# EAGLE board power (EAGLE 8.3.1)
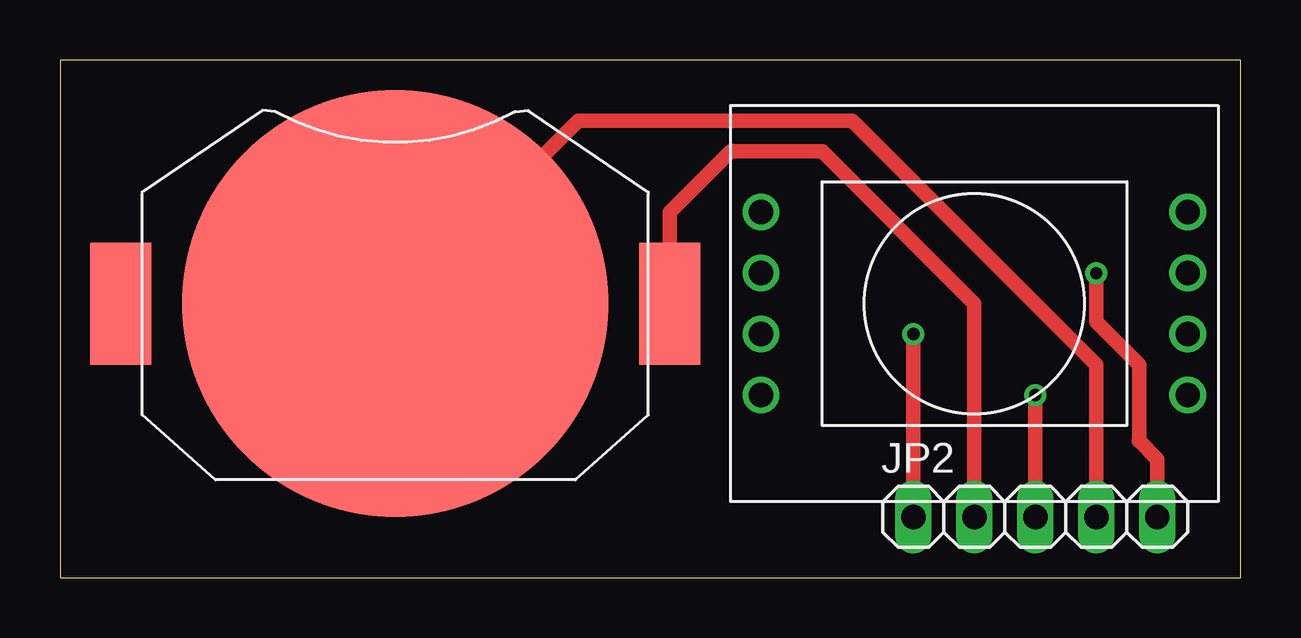
[diagram p0: board, top side]
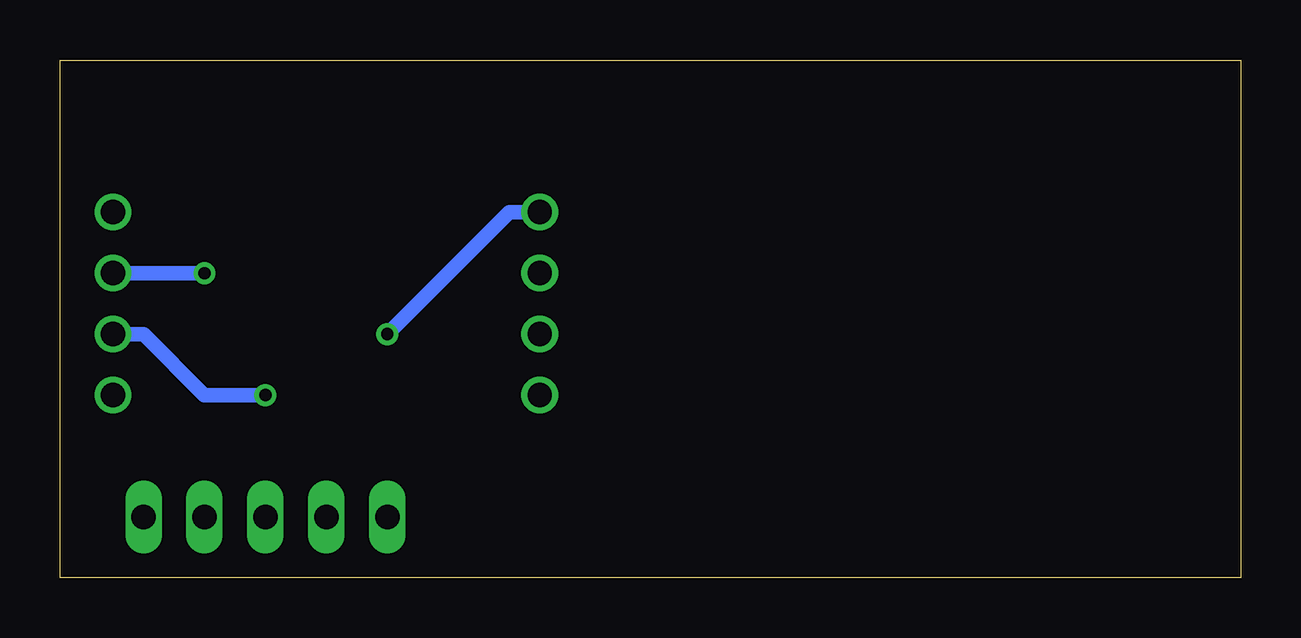
[diagram p1: board, bottom side, seen from below]

Size 49.2 x 21.58 mm. Coordinates in mm from the lower left corner, seen from the top.
Outline: 0,0 49.2,0 49.2,21.58 0,21.58 0,0
Copper layers (1*16): Top 0.035mm / dielectric 1.5mm / Bottom 0.035mm
Design rules "DRC Electronics Lab": minimum track width 16mil, minimum drill 19mil, track to track 16mil, track to pad 12mil, pad to pad 16mil, via to via 16mil, smd to smd 10mil, copper to edge 40mil, drill to drill 10mil, minimum pad ring 10mil, minimum via ring 8mil, stop-mask expansion 4mil, vias tented up to drill 0mil, thermal gap 10mil

## Footprints (pad centres in the part's own frame; a part is rotated, then mirrored left to right if it is on the bottom)
1X05 = drill 1.016 long: 1 -5.08,0; 2 -2.54,0; 3 0,0; 4 2.54,0; 5 5.08,0
MOMENTARY_POWER_BUTTON = drill 1.016: GND@0 -8.89,2.54; GND@1 8.89,2.54; IN@0 -8.89,7.62; IN@1 8.89,7.62; OFF@0 -8.89,0; OFF@1 8.89,0; OUT@0 -8.89,5.08; OUT@1 8.89,5.08
CR2032-20MM-CONN = smd 17.78 x 17.78: GND 0,0 | smd 2.54 x 5.08: V+@0 -11.43,0; V+@1 11.43,0

## Placement (x,y rotation side)
JP2  [1X05]  40.64,2.54 0 top
U$1  MOMENTARY_PUSH  [MOMENTARY_POWER_BUTTON]  38.1,7.62 0 top
U$2  CR2032-20MM-CONN  [CR2032-20MM-CONN]  13.97,11.43 180 top

## Library data of the parts
JP2 = HyTechDevices
U$1 U$2 = CH

## Nets
5V: JP2.1 U$1.IN@0 U$1.IN@1
BTN_ON: JP2.5 U$1.OUT@0 U$1.OUT@1
GND: JP2.3 U$1.GND@0 U$1.GND@1
RTC3.3: JP2.2 U$2.V+@0 U$2.V+@1
RTCGND: JP2.4 U$2.GND

## Tracks (layer width: path | path; a pad name or v marks a point on that pad's centre or on a via)
5V  (via drill 0.51)
  Top 0.61: v35.56,10.16 JP2.1
  Bottom 0.61: U$1.IN@0 30.48,15.24 v35.56,10.16
BTN_ON  (via drill 0.51)
  Top 0.61: JP2.5 45.72,4.95 44.97,5.71 | 44.97,5.71 44.96,5.71 | 44.97,5.71 44.97,8.88 43.18,10.67 v43.18,12.7
  Bottom 0.61: U$1.OUT@1 v43.18,12.7
GND  (via drill 0.51)
  Top 0.61: JP2.3 v40.64,7.62
  Bottom 0.61: v40.64,7.62 43.18,7.62 45.72,10.16 U$1.GND@1
RTC3.3
  Top 0.61: JP2.2 38.1,11.43 31.75,17.78 27.94,17.78 25.4,15.24 U$2.V+@0
RTCGND
  Top 0.61: JP2.4 43.18,8.89 33.02,19.05 21.59,19.05 U$2.GND